# Altium PCB PCB 1.0.PcbDoc
Units mm, origin at the board's own origin, x right, y up, seen from the top; angles counter-clockwise.
Board outline 80.52 x 140.08 mm, 2 copper layers (Top Layer, Bottom Layer); 41 components, 49 nets, 205 pads, 6 vias.
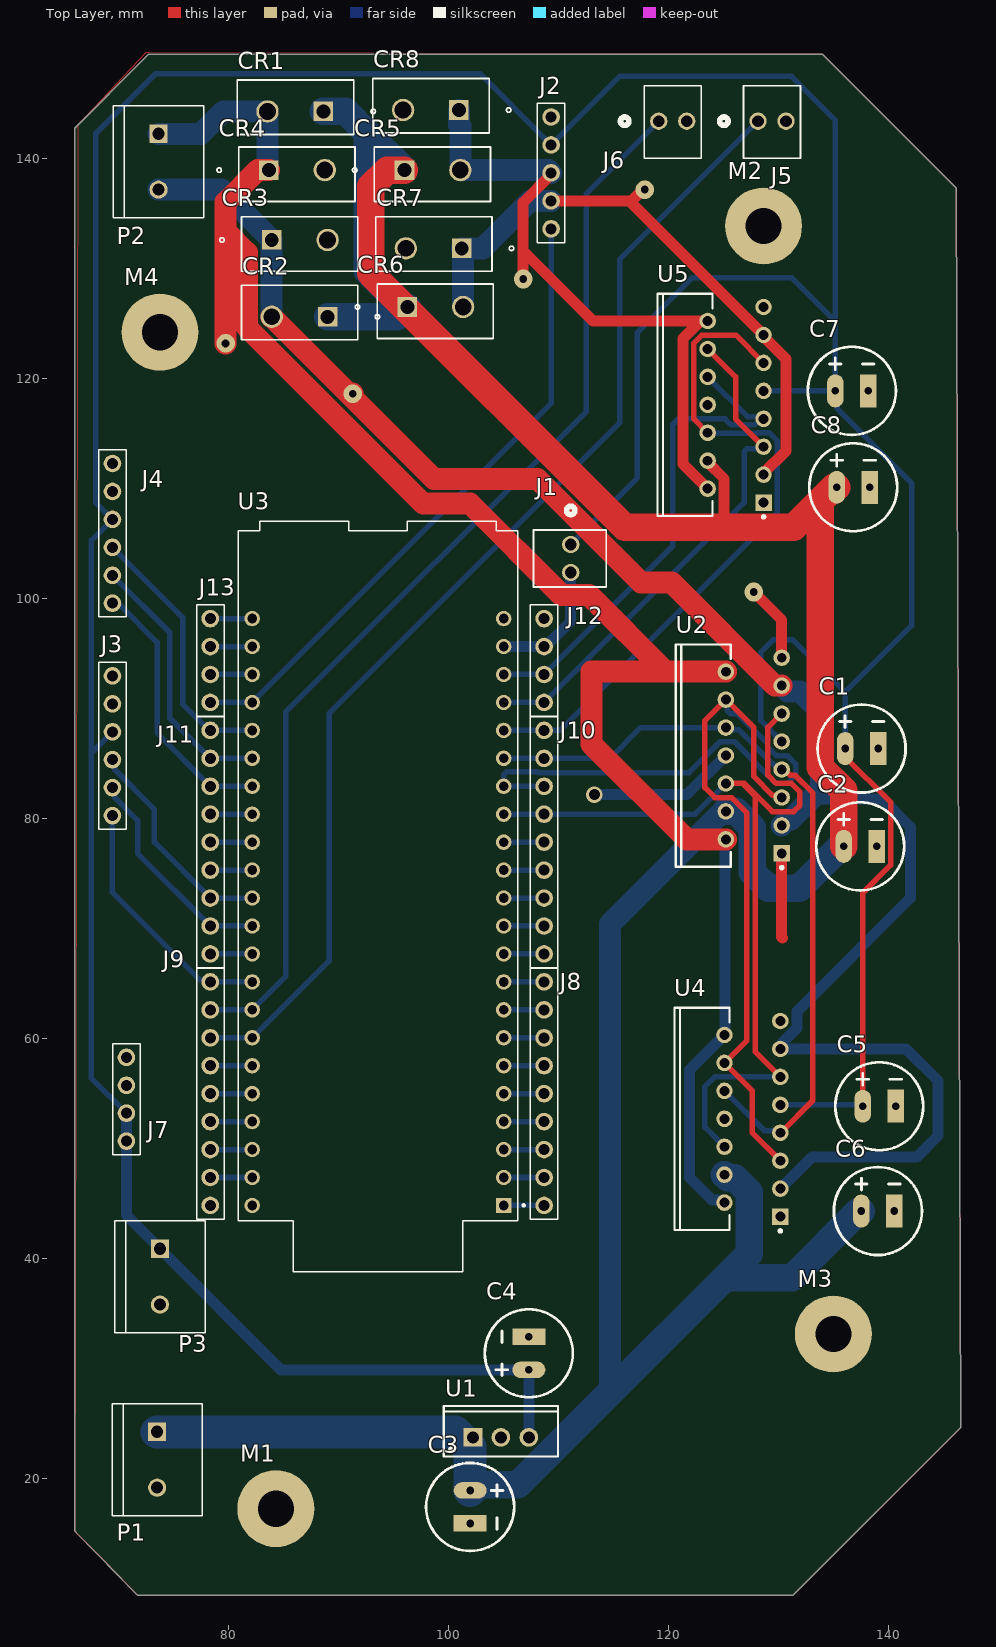
[diagram p0: Top Layer view]
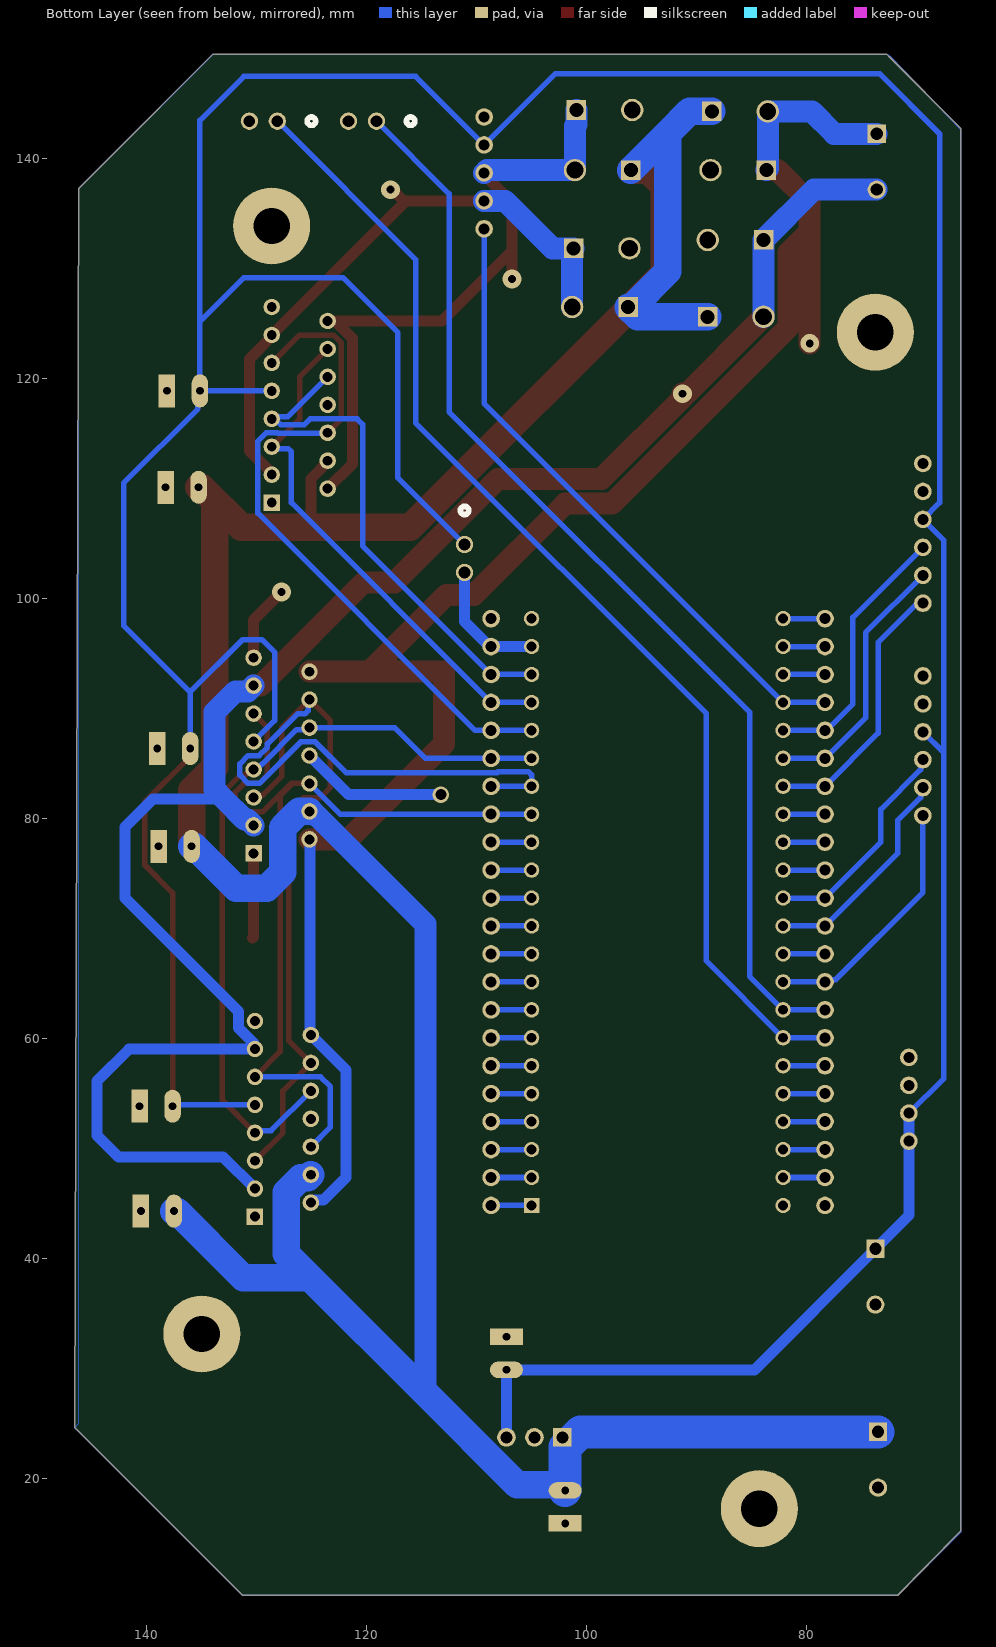
[diagram p1: Bottom Layer view, seen from below]

## Layer stack, top to bottom
Top Solder: solder mask 0.0102, Solder Resist, Dk 3.5
Top Layer: signal copper 0.0356
Dielectric 1: dielectric 0.32, FR-4, Dk 4.8
Bottom Layer: signal copper 0.0356
Bottom Solder: solder mask 0.0102, Solder Resist, Dk 3.5

## Board outline
66.167,15.113 71.755,9.398 131.318,9.398 146.558,24.638 146.558,25.019 146.177,137.287 143.637,139.827 133.985,149.479 72.771,149.479 72.39,149.098 66.04,142.748 66.04,15.24

## Design rules (kind name [scope] priority, off if disabled: settings)
Clearance [All] p1: gap=0.254 ignorepadtopadclearanceinfootprint=FALSE
PolygonConnect [All] p1: connectstyle=Relief reliefconductorwidth=0.254 reliefentries=4 polygonreliefangle="90 Angle" airgapwidth=0.254
RoutingVias [All] p1: holewidth=0.711 width=1.7 viastyle="Through Hole" minholewidth=0.711 minwidth=1.7 maxholewidth=1.5 maxwidth=3
SolderMaskExpansion [All] p1: expansion=0.102 istentingtop=FALSE
SupplyNets "Schematic Supply Nets_3" [InNet('GND')] p1: voltage=0.000
SupplyNets "Schematic Supply Nets_2" [InNet('+5')] p2: voltage=0.000
SupplyNets "Schematic Supply Nets_1" [InNet('Vin')] p3: voltage=0.000
SupplyNets "Schematic Supply Nets" [InNet('+12')] p4: voltage=0.000
Width [All] p1: maxlimit=5 minlimit=0.5 preferedwidth=0.5 minimp=50.000000 maximp=50.000000 favimp=50.000000
30 further rules are at their usual default settings.

## Components (designator, comment, footprint, x,y, rotation, side; value= is the part's Value field where it differs from the comment)
C1 "Cap" "Cap Lyt Ø8" 136.065,86.36 r0 top value=100nF
C2 "Cap" "Cap Lyt Ø8" 135.938,77.47 r0 top value=100nF
C3 "Cap" "Cap Lyt Ø8" 101.981,18.923 r270 top value=0.33uF
C4 "Cap" "Cap Lyt Ø8" 107.315,29.893 r90 top value=0.1uF
C5 "Cap" "Cap Lyt Ø8" 137.668,53.848 r0 top value=100nF
C6 "Cap" "Cap Lyt Ø8" 137.541,44.323 r0 top value=100nF
C7 "Cap" "Cap Lyt Ø8" 135.176,118.872 r0 top value=100nF
C8 "Cap" "Cap Lyt Ø8" 135.303,110.109 r0 top value=100nF
CR1 "BYV29-400" SOD59_WEN 88.646,144.272 r180 top
CR2 "BYV29-400" SOD59_WEN 89.027,125.603 r180 top
CR3 "BYV29-400" SOD59_WEN 83.947,132.588 r0 top
CR4 "BYV29-400" SOD59_WEN 83.693,138.938 r0 top
CR5 "BYV29-400" SOD59_WEN 96.012,138.938 r0 top
CR6 "BYV29-400" SOD59_WEN 96.266,126.492 r0 top
CR7 "BYV29-400" SOD59_WEN 101.219,131.826 r180 top
CR8 "BYV29-400" SOD59_WEN 100.965,144.399 r180 top
J1 "22232021" CONN_A-6373-02A_MOL 111.125,104.902 r270 top
J2 "Header 1x5" "Header 1x5" 109.347,133.604 r90 top
J3 "Header 1x6" "Header 1x6" 69.469,92.964 r270 top
J4 "Header 1x6" "Header 1x6" 69.469,112.268 r270 top
J5 "22232021" CONN_A-6373-02A_MOL 128.143,143.383 r0 top
J6 "22232021" CONN_A-6373-02A_MOL 119.126,143.383 r0 top
J7 "Header 1x4" "Header 1x4" 70.739,58.293 r270 top
J8 "Header 1x9" "Header 1x9" 108.712,44.831 r90 top
J9 "Header 1x9" "Header 1x9" 78.359,65.151 r270 top
J10 "Header 1x9" "Header 1x9" 108.712,67.691 r90 top
J11 "Header 1x9" "Header 1x9" 78.359,88.011 r270 top
J12 "Header 1x4" "Header 1x4" 108.712,90.551 r90 top
J13 "Header 1x4" "Header 1x4" 78.359,98.171 r270 top
M1 "Screw Hole" "M3 Hole" 84.328,17.272 r0 top
M2 "Screw Hole" "M3 Hole" 128.651,133.858 r0 top
M3 "Screw Hole" "M3 Hole" 135.001,33.147 r0 top
M4 "Screw Hole" "M3 Hole" 73.787,124.206 r0 top
P1 "282837-2" TE_282837-2 73.533,21.717 r270 top
P2 "282837-2" TE_282837-2 73.66,139.7 r270 top
P3 "282837-2" TE_282837-2 73.787,38.354 r270 top
U1 "L7805CV" TO220 104.775,23.749 r0 top
U2 "L298N" STM-FM-15 127.762,85.725 r180 top
U3 "ESP32-S3-DEVKITM-1-N8" MODULE_ESP32-S3-DEVKITM-1-N8 93.599,74.801 r180 top
U4 "L298N" STM-FM-15 127.635,52.705 r180 top
U5 "L298N" STM-FM-15 126.111,117.602 r180 top

## Footprints (in the part's own frame and the unit in brackets; to place one, negate y for a bottom-side part, rotate by r counter-clockwise, add the part's x,y. Pads: shape width x height; smd on the part's side, far side on the other; paste and mask are expansions set on the pad)
"Cap Lyt Ø8" [mm] "Capacitor"
  oval 1.5x3 hole 0.7: 1(0,0)
  rect 1.5x3 hole 0.7: 2(3,0)
  silkscreen extent -2.5,-4 5.5,4
CONN_A-6373-02A_MOL [mil]
  round 62 hole 42: 1(0,0) 2(100,0)
  silkscreen extent -137,-133 152,127
"Header 1x4" [mm]
  round 1.6 hole 1: 1(0,0) 2(2.54,0) 3(5.08,0) 4(7.62,0)
  silkscreen extent -1.25,-1.25 8.87,1.25, body extent -1.27,-1.27 8.89,1.27, height 8.89
"Header 1x5" [mm]
  round 1.6 hole 1: 1(0,0) 2(2.54,0) 3(5.08,0) 4(7.62,0) 5(10.16,0)
  silkscreen extent -1.25,-1.25 11.41,1.25, body extent -1.27,-1.27 11.43,1.27, height 8.89
"Header 1x6" [mm]
  round 1.6 hole 1: 1(0,0) 2(2.54,0) 3(5.08,0) 4(7.62,0) 5(10.16,0) 6(12.7,0)
  silkscreen extent -1.25,-1.25 13.95,1.25, body extent -1.26,-1.27 13.98,1.27, height 8.89
"Header 1x9" [mm]
  round 1.6 hole 1: 1(0,0) 2(2.54,0) 3(5.08,0) 4(7.62,0) 5(10.16,0) 6(12.7,0) 7(15.24,0) 8(17.78,0) 9(20.32,0)
  silkscreen extent -1.25,-1.25 21.57,1.25, body extent -1.27,-1.27 21.59,1.27, height 8.89
"M3 Hole" [mm]
  round 7 hole 3.3 mask+0: 1(0,0)
MODULE_ESP32-S3-DEVKITM-1-N8 [mil]
  rect 55x55 / inner round 55 / far side rect 55x55 hole 35: J1_1(-450,1179.92)
  round 55 hole 35: J1_2(-450,1079.92) J1_3(-450,979.92) J1_4(-450,879.92) J1_5(-450,779.92) J1_6(-450,679.92) J1_7(-450,579.92) J1_8(-450,479.92) J1_9(-450,379.92) J1_10(-450,279.92) J1_11(-450,179.92) J1_12(-450,79.92) J1_13(-450,-20.08) J1_14(-450,-120.08) J1_15(-450,-220.08) J1_16(-450,-320.08) J1_17(-450,-420.08) J1_18(-450,-520.08) J1_19(-450,-620.08) J1_20(-450,-720.08) J1_21(-450,-820.08) J1_22(-450,-920.08) J3_1(450,1179.92) J3_2(450,1079.92) J3_3(450,979.92) J3_4(450,879.92) J3_5(450,779.92) J3_6(450,679.92) J3_7(450,579.92) J3_8(450,479.92) J3_9(450,379.92) J3_10(450,279.92) J3_11(450,179.92) J3_12(450,79.92) J3_13(450,-20.08) J3_14(450,-120.08) J3_15(450,-220.08) J3_16(450,-320.08) J3_17(450,-420.08) J3_18(450,-520.08) J3_19(450,-620.08) J3_20(450,-720.08) J3_21(450,-820.08) J3_22(450,-920.08)
  silkscreen extent -526,-1269 500,1417
SOD59_WEN [mil]
  rect 70x70 / inner round 60 / far side rect 70x70 hole 50 paste-99999 mask+0: 1(0,0)
  round 80 / inner round 60 / far side round 80 hole 60 paste-99999 mask+0: 2(200,0)
  silkscreen extent -186,-113 308,83
STM-FM-15 [mm] "FM, 15-Leads, Body 20.2x5mm, Pitch 1.27mm"
  rect 1.5x1.5 hole 0.9: 1(-2.54,8.89)
  round 1.5 hole 0.9: 2(2.54,7.62) 3(-2.54,6.35) 4(2.54,5.08) 5(-2.54,3.81) 6(2.54,2.54) 7(-2.54,1.27) 8(2.54,0) 9(-2.54,-1.27) 10(2.54,-2.54) 11(-2.54,-3.81) 12(2.54,-5.08) 13(-2.54,-6.35) 14(2.54,-7.62) 15(-2.54,-8.89)
  silkscreen extent -2.67,-10.1 7.09,10.31, body extent -2.8,-10.1 7.09,10.1, height 21
TE_282837-2 [mm]
  rect 1.65x1.65 / inner round 1.65 / far side rect 1.65x1.65 hole 1.1: 1(-2.54,0)
  round 1.65 hole 1.1: 2(2.54,0)
  silkscreen extent -5.08,-4.1 5.08,4.1, body extent -5.68,-4.1 5.08,4.1, height 10
TO220 [mm] "TO, Thru-Hole, Vertical, Heatsink Mounted; 3 In-Line Leads; Pitch 2.54 mm"
  rect 1.7x1.7 hole 1.1: 1(-2.54,0)
  round 1.7 hole 1.1: 2(0,0) 3(2.54,0)
  silkscreen extent -5.2,-1.75 5.2,2.85, body extent -5.25,-1.8 5.25,2.9, height 19.7

## Part data
C1 C2 C3 C4 C5 C6 C7 C8: library part "Capacitor electrolytic"
CR1 CR2 CR3 CR4 CR5 CR6 CR7 CR8: library part BYV29-500, "No Description Available", Manufacturer_Name="WeEN Semiconductors", Copyright="Copyright (C) 2025 Ultra Librarian. All rights reserved.", Manufacturer_Part_Number=BYV29-500
J1 J5 J6: library part CMP-005-000000-1, "Connector Header Through Hole 2 position 0.100 (2.54mm)", Package=None, Check_prices=https://www.snapeda.com/parts/22232021/Molex/view-part/?ref=eda, Component Type=Standard, Design Item ID=22232021, MF=Molex, MP=22232021, Pin Count=2, SnapEDA_Link=https://www.snapeda.com/parts/22232021/Molex/view-part/?ref=snap, Source=22232021.SchLib
P1 P2 P3: library part CMP-007-000000-1, "Ð Ð°Ð·ÑŠÐµÐ¼Ð½Ñ‹Ðµ ÐºÐ»ÐµÐ¼Ð¼Ð½Ñ‹Ðµ ÐºÐ¾Ð»Ð¾Ð´ÐºÐ¸ Ð Ð¾Ð·ÐµÑ‚ÐºÐ° 2 Ð¿Ð¾Ð»Ð¾Ð¶ÐµÐ½Ð¸Ñ 5,08 Ð¼Ð¼ ÐŸÑ€Ð¸Ð¿Ð¾Ð¹ Ð¿Ñ€ÑÐ¼Ð¾Ð¹ Ñ‡ÐµÑ€ÐµÐ· Ð¾Ñ‚Ð²ÐµÑ€ÑÑ‚Ð¸Ðµ 13,5 Ð / ÐºÐ¾Ð½Ñ‚Ð°ÐºÑ‚", Package=None, Availability="In Stock", Check_prices=https://www.snapeda.com/parts/282837-2/TE+Connectivity+AMP+Connectors/view-part/?ref=eda, Component Type=Standard, Design Item ID=282837-2, MF="TE Connectivity", MP=282837-2, Pin Count=2, Price=None, Purchase-URL=https://pricing.snapeda.com/search/part/282837-2/?ref=eda, SnapEDA_Link=https://www.snapeda.com/parts/282837-2/TE+Connectivity+AMP+Connectors/view-part/?ref=snap, Source=282837-2.SchLib
U1: library part CMP-0244-00483-1, "Positive Voltage Regulator, 5V, 3-Pin TO-220", ComponentLink1Description="Manufacturer URL", ComponentLink1URL=http://www.st.com, ComponentLink2Description=Datasheet, ComponentLink2URL=http://www.st.com/internet/com/TECHNICAL_RESOURCES/TECHNICAL_LITERATURE/DATASHEET/CD00000444.pdf, ComponentLink3Description="Package Specification", ComponentLink3URL=http://www.st.com/internet/com/TECHNICAL_RESOURCES/TECHNICAL_LITERATURE/PACKAGE_INFORMATION/CD00004649.pdf, DatasheetVersion=16/11/2011, PackageDescription="TO, Thru-Hole, Vertical, Heatsink Mounted; 3 In-Line Leads; Pitch 2.54 mm", PackageReference=TO220, PackageVersion=ver3.0
U2 U4 U5: library part CMP-2000-06526-1, "Dual Full-Bridge Driver, 4.8 to 46 V, -40 to 150 degC, 15-Pin FM (MW 15L), RoHS, Tube", Driver Case Style=Multiwatt, Manufacturer=STMicroelectronics, Operating Temperature Max=130°C, Operating Temperature Min=-25°C, Output Current=2A, Output Voltage=46V, Package Description="15-Pin Flange Mount, Body 5 x 19.6 mm, Pitch 1.27 mm", Package Reference=FM-15, PartNumber=L298, Supply Voltage Max=7V, Supply Voltage Min=4.5V, Automotive Qualification Standard=-, Datasheet URL=https://datasheet.ciiva.com/15109/getdatasheetpartid-50682-15109332.pdf, Datasheet Version=01/2000, Manufacturer URL=http://www.st.com/, Motor Type=FullBridge, Mounting Technology=ThroughHole, MSL=-, No. of Outputs=4Outputs, No. of Pins=15Pins, Packaging=Each, Product Range=-, SVHC=NoSVHC(17-Dec-2015)
U3: library part CMP-003-000000-1, Package=None, Availability=Unavailable, Component Type=Standard, Design Item ID=ESP32-S3-DEVKITM-1-N8, MF="{'manufacturer': u'Espressif Systems'}", MP=ESP32-S3-DEVKITM-1-N8, Pin Count=44, Price=None, Source=ESP32-S3-DEVKITM-1-N8.SchLib

## Via types
v1: diameter 1.7, hole 0.711, Top Layer to Bottom Layer, 5 vias
v2: diameter 1.5, hole 1, Top Layer to Bottom Layer, 1 vias

## Nets (pads, with @x,y where several pads share a name; then routed paths per layer and width w, separated by ;. In a path a pad name is that pad's centre, name@x,y a point inside that pad or via, vN(x,y) a via of type N, cw(c..) or ccw(c..) an arc to the next point about the centre after c; other vN are vias at no path point)
+5: C1.1 C4.1 C5.1 C7.1 J1.1 J2.4 J3.3 J4.3 J7.3 J7.4 P3.1 U1.3 U2.9 U4.9 U5.9 | length 403
  Top Layer w0.5: C1.1 136.065,85.61 140.192,81.483 140.192,75.761 137.668,73.237 C5.1
  Bottom Layer w0.5: J3.3 67.564,85.979 ; J7.3 67.564,56.388 67.564,85.979 ; J1.1 117.191,110.968 117.191,124.176 122.174,129.159 131.191,129.159 135.176,125.174 ; U5.9 C7.1 ; U4.9 137.541,53.975 C5.1 ; U2.9 128.397,88.9 128.397,95.123 129.54,96.266 131.286,96.266 136.065,91.487 ; C1.1 136.065,91.487 ; 67.564,85.979 67.564,105.283 J4.3 67.945,108.712 67.945,142.24 73.406,147.701 102.87,147.701 J2.4 115.57,147.447 131.191,147.447 135.176,143.462 135.176,125.174 ; C7.1 135.367,118.681 135.367,117.236 142.113,110.49 142.113,97.535 136.065,91.487 ; C7.1 135.176,125.174
  Bottom Layer w1: J7.3 J7.4 70.739,43.942 P3.1 84.788,29.893 C4.1 U1.3
+12: C2.1 C3.1 C6.1 C8.1 CR1.1 CR2.1 CR5.1 CR6.1 P1.1 U1.1 U2.4 U4.4 U5.4 | length 305.2
  Top Layer w1: U5.4 123.571,112.387 125.075,110.883 125.075,106.504 125.661,105.918
  Top Layer w2.5: CR5.1 94.428,138.938 92.964,137.474 92.964,129.54 116.046,106.458 125.661,106.458 131.402,106.458 135.053,110.109 C8.1 ; 133.811,108.867 133.811,84.676 135.938,82.549 C2.1
  Bottom Layer w2: 114.695,27.799 114.695,70.412 124.642,80.359 124.936,80.359 U2.4
  Bottom Layer w2.5: CR1.1 90.678,144.272 92.647,142.303 ; CR2.1 95.377,125.603 CR6.1 95.885,126.492 92.647,129.731 92.647,142.303 ; CR5.1 92.647,142.303 ; C3.1 101.981,19.173 102.231,19.423 106.318,19.423 114.695,27.799 125.172,38.277 ; U4.4 125.381,47.339 126.029,47.339 127.349,46.019 127.349,40.454 125.172,38.277 ; U2.4 126.171,80.645 127.635,79.181 127.635,75.124 129.099,73.66 131.878,73.66 135.688,77.47 C2.1 ; C6.1 137.291,44.323 131.245,38.277 125.172,38.277
  Bottom Layer w3: P1.1 100.584,24.257 101.981,22.86 C3.1
GND: C1.2 C2.2 C3.2 C4.2 C5.2 C6.2 C7.2 C8.2 CR3.2 CR4.2 CR7.2 CR8.2 J2.5 J3.1 J3.2 J4.1 J4.2 J5.2 J6.2 J7.1 J7.2 J9.9 J12.4 P1.2 P3.2 U1.2 U2.1 U2.8 U2.15 U3.J1_22 U3.J3_1 U4.1 U4.8 U4.15 U5.1 U5.8 U5.15 | length 28.2
  Top Layer w1: v1(127.762,100.584) 130.302,98.044 U2.15 ; U2.1 130.302,69.235 130.386,69.152
  Bottom Layer w1: v2(113.284,82.169) 121.666,82.169 U2.8
NetCR1_2: CR1.2 CR4.1 P2.1 U2.2 U2.14 U4.2 U4.14 | length 165.5
  Top Layer w2: v1(79.756,123.19) 79.756,133.35 ; CR4.1 82.677,138.938 79.756,136.017 79.756,133.35 ; U2.2 121.666,78.105 112.995,86.776 112.995,93.345 119.761,93.345 ; U2.14 119.761,93.345 ; 79.756,133.35 81.677,131.429 81.677,124.663 97.723,108.617 101.983,108.617 110.279,100.321 112.785,100.321 119.761,93.345
  Bottom Layer w1: U4.2 124.96,45.085 124.71,45.335 123.956,45.335 121.92,47.371 121.92,57.15 U4.14 125.158,60.389 125.158,78.041 U2.2
  Bottom Layer w2: P2.1 77.525,142.24 79.551,144.266 83.56,144.266 CR1.2 83.566,139.065 CR4.1
NetCR2_2: CR2.2 CR3.1 P2.2 U2.3 U2.13 U4.3 U4.13 | length 170.7
  Top Layer w2: CR2.2 90.938,118.612 v1(91.307,118.612) ; v1@91.123,118.427 98.679,110.871 108.092,110.871 117.49,101.473 120.282,101.473 129.68,92.075 U2.13
  Bottom Layer w1: U4.3 133.063,49.243 142.588,49.243 144.526,51.181 144.526,56.134 141.605,59.055 U4.13 130.271,59.151 130.271,59.564 131.679,60.972 131.679,62.464 141.986,72.771 141.986,79.248 139.446,81.788 133.009,81.788 ; U2.3 130.398,79.471 131.287,79.471 132.461,80.645
  Bottom Layer w2: P2.2 79.375,137.16 CR3.1 CR2.2 ; U2.3 130.838,79.911 131.132,79.911 133.009,81.788 133.858,82.637 133.858,89.662 131.953,91.567 130.81,91.567 U2.13
NetCR5_2: CR5.2 CR8.1 J2.3 U5.2 U5.14 | length 60.7
  Top Layer w1: v1(106.807,129.032) 106.807,131.572 ; J2.3 109.347,138.539 106.807,135.999 106.807,131.572 ; 122.822,125.126 121.313,123.617 121.313,112.24 U5.2 ; U5.14 113.157,125.222 106.807,131.572
  Bottom Layer w2: CR8.1 100.965,143.074 101.086,142.953 101.086,138.944 CR5.2 109.093,138.938 J2.3
NetCR6_2: CR6.2 CR7.1 J2.2 U5.3 U5.13 | length 56.4
  Top Layer w1: J2.2 115.951,136.144 ; v1(117.856,137.16) 117.667,137.16 116.651,136.144 115.951,136.144 ; U5.3 128.651,111.387 130.683,113.419 130.683,121.785 128.651,123.817 U5.13 116.459,136.144 115.951,136.144
  Bottom Layer w2: CR6.2 101.346,131.699 CR7.1 103.124,131.826 107.442,136.144 J2.2
NetJ2_1: J2.1 J13.4 U3.J3_19 | length 58.1
  Bottom Layer w0.5: J13.4 U3.J3_19 109.347,117.729 J2.1
NetJ3_4: J3.4 J11.7 U3.J3_12 | length 20.1
  Bottom Layer w0.5: J3.4 69.679,85.134 69.679,84.438 73.279,80.838 73.279,77.851 J11.7 U3.J3_12
NetJ3_5: J3.5 J11.8 U3.J3_11 | length 20.1
  Bottom Layer w0.5: J3.5 69.679,82.594 69.679,81.898 71.755,79.822 71.755,76.835 J11.8 U3.J3_11
NetJ3_6: J3.6 J9.1 U3.J3_9 | length 23.1
  Bottom Layer w0.5: J3.6 69.469,73.279 77.387,65.361 78.149,65.361 J9.1 U3.J3_9
NetJ4_4: J4.4 J11.1 U3.J3_18 | length 24.2
  Bottom Layer w0.5: J4.4 75.838,98.279 75.838,90.405 78.232,88.011 U3.J3_18
NetJ4_5: J4.5 J11.2 U3.J3_17 | length 24.1
  Bottom Layer w0.5: J4.5 74.676,96.901 74.676,89.154 J11.2 U3.J3_17
NetJ4_6: J4.6 J11.3 U3.J3_16 | length 24.4
  Bottom Layer w0.5: J4.6 69.679,99.358 70.187,99.358 73.533,96.012 73.533,87.757 J11.3 U3.J3_16
NetJ5_1: J5.1 J9.3 U3.J3_7 | length 106.2
  Bottom Layer w0.5: J9.3 U3.J3_7 89.154,67.056 89.154,89.535 115.57,115.951 115.57,130.81 J5.1
NetJ6_1: J6.1 J9.2 U3.J3_8 | length 99.9
  Bottom Layer w0.5: J9.2 U3.J3_8 85.217,65.659 85.217,89.662 112.522,116.967 112.522,136.779 J6.1
NetJ8_1: J8.1 U3.J1_1 | length 3.7
  Bottom Layer w0.5: U3.J1_1 J8.1
NetJ8_2: J8.2 U3.J1_2 | length 3.7
  Bottom Layer w0.5: U3.J1_2 J8.2
NetJ8_3: J8.3 U3.J1_3 | length 3.7
  Bottom Layer w0.5: U3.J1_3 J8.3
NetJ8_4: J8.4 U3.J1_4 | length 3.7
  Bottom Layer w0.5: U3.J1_4 J8.4
NetJ8_5: J8.5 U3.J1_5 | length 3.7
  Bottom Layer w0.5: U3.J1_5 J8.5
NetJ8_6: J8.6 U3.J1_6 | length 3.7
  Bottom Layer w0.5: U3.J1_6 J8.6
NetJ8_7: J8.7 U3.J1_7 | length 3.7
  Bottom Layer w0.5: U3.J1_7 J8.7
NetJ8_8: J8.8 U3.J1_8 | length 3.7
  Bottom Layer w0.5: U3.J1_8 J8.8
NetJ8_9: J8.9 U3.J1_9 | length 3.7
  Bottom Layer w0.5: U3.J1_9 J8.9
NetJ9_4: J9.4 U3.J3_6 | length 3.8
  Bottom Layer w0.5: J9.4 U3.J3_6
NetJ9_5: J9.5 U3.J3_5 | length 3.8
  Bottom Layer w0.5: J9.5 U3.J3_5
NetJ9_6: J9.6 U3.J3_4 | length 3.8
  Bottom Layer w0.5: J9.6 U3.J3_4
NetJ9_7: J9.7 U3.J3_3 | length 3.8
  Bottom Layer w0.5: J9.7 U3.J3_3
NetJ9_8: J9.8 U3.J3_2 | length 3.8
  Bottom Layer w0.5: J9.8 U3.J3_2
NetJ10_1: J10.1 U3.J1_10 | length 3.7
  Bottom Layer w0.5: U3.J1_10 J10.1
NetJ10_2: J10.2 U3.J1_11 | length 3.7
  Bottom Layer w0.5: U3.J1_11 J10.2
NetJ10_3: J10.3 U3.J1_12 | length 3.7
  Bottom Layer w0.5: U3.J1_12 J10.3
NetJ10_4: J10.4 U3.J1_13 | length 3.7
  Bottom Layer w0.5: U3.J1_13 J10.4
NetJ10_5: J10.5 U3.J1_14 | length 3.7
  Bottom Layer w0.5: U3.J1_14 J10.5
NetJ10_6: J10.6 U2.6 U2.11 U3.J1_15 U4.6 U4.11 | length 83
  Top Layer w0.5: U2.6 U2.6@125.493,83.185 ; U4.11 127.881,58.809 127.881,82.05 126.746,83.185 U2.6@125.493,83.185 ; U2.11 129.048,88.281 129.048,83.936 129.783,83.201 131.175,83.201 131.953,82.423 131.953,81.192 131.39,80.629 129.451,80.629 127.956,82.125 126.895,83.185 U2.6@125.493,83.185
  Bottom Layer w0.5: U3.J1_15 122.428,80.391 U2.6 ; U4.6 123.317,51.943 123.317,55.626 124.206,56.515 U4.11
NetJ10_7: J10.7 U2.5 U2.12 U3.J1_16 U4.5 U4.12 | length 104.4
  Top Layer w0.5: U4.5 127.635,51.435 127.635,55.245 U4.12 127.127,59.817 127.127,80.513 125.741,81.899 124.222,81.899 123.317,82.804 123.317,88.9 U2.12 127.762,88.265 127.762,83.82 129.476,82.106 130.111,82.106 U2.5
  Bottom Layer w0.5: J10.7 U3.J1_16 105.033,82.935 105.033,83.976 105.326,84.269 108.07,84.269 108.172,84.167 121.891,84.167 124.703,86.979 126.005,86.979 129.783,83.201 130.821,83.201 131.556,83.936 131.556,84.974 130.805,85.725 129.799,85.725 129.048,86.476 129.048,86.775 126.304,89.519 125.643,89.519 125.35,89.812 125.35,90.677 U2.12
NetJ10_8: J10.8 U2.7 U2.10 U3.J1_17 U4.7 U4.10 | length 70.5
  Top Layer w0.5: U4.7 133.133,54.393 133.133,82.31 131.487,83.955 131.073,83.955 130.573,84.455 U2.7
  Bottom Layer w0.5: U3.J1_17 J10.8 114.681,85.471 117.475,88.265 U2.10 125.413,88.074 126.384,88.074 129.486,84.971 129.515,84.971 130.031,84.455 U2.7 ; U4.10 128.714,51.626 129.984,51.626 U4.7
NetJ10_9: J10.9 U3.J1_18 U5.6 U5.11 | length 62.6
  Top Layer w0.5: U5.6 122.317,116.316 122.317,123.201 123.052,123.936 126.127,123.936 U5.11
  Bottom Layer w0.5: U3.J1_18 110.163,88.011 129.905,107.753 129.905,114.311 129.17,115.046 128.132,115.046 128.101,115.015 123.618,115.015 U5.6
NetJ11_4: J11.4 U3.J3_15 | length 3.8
  Bottom Layer w0.5: J11.4 U3.J3_15
NetJ11_5: J11.5 U3.J3_14 | length 3.8
  Bottom Layer w0.5: J11.5 U3.J3_14
NetJ11_6: J11.6 U3.J3_13 | length 3.8
  Bottom Layer w0.5: J11.6 U3.J3_13
NetJ11_9: J11.9 U3.J3_10 | length 3.8
  Bottom Layer w0.5: J11.9 U3.J3_10
NetJ12_1: J12.1 U3.J1_19 U5.5 U5.12 | length 47
  Top Layer w0.5: U5.12 126.111,120.142 126.111,116.332 U5.5
  Bottom Layer w0.5: U3.J1_19 J12.1 126.873,108.712 126.873,113.339 127.166,113.632 128.491,113.632 U5.5
NetJ12_2: J12.2 U3.J1_20 U5.7 U5.10 | length 46.4
  Bottom Layer w0.5: U3.J1_20 J12.2 120.396,104.775 120.396,115.824 120.888,116.316 125.161,116.316 125.708,115.769 127.818,115.769 U5.7@128.38,116.332 ; U5.10 127.19,116.523 128.46,116.523 U5.7@128.516,116.467
NetJ13_1: J13.1 U3.J3_22 | length 3.8
  Bottom Layer w0.5: J13.1 U3.J3_22
NetJ13_2: J13.2 U3.J3_21 | length 3.8
  Bottom Layer w0.5: J13.2 U3.J3_21
NetJ13_3: J13.3 U3.J3_20 | length 3.8
  Bottom Layer w0.5: J13.3 U3.J3_20
Vin: J1.2 J12.3 U3.J1_21 | length 11.5
  Bottom Layer w1: U3.J1_21 108.839,95.631 111.125,97.917 J1.2
pads on no net: M1.1 M2.1 M3.1 M4.1

## Polygon pours and split planes (outlines as drawn)
GND on Bottom Layer "NONET_L02_P001" (solid, shelved, pour order 1): 72.644,149.479 72.39,149.225 66.04,142.621 66.04,15.113 71.755,9.398 131.318,9.398 146.558,24.638 146.177,25.019 146.177,137.287 133.985,149.479
GND on Top Layer "NONET_L01_P000" (solid, shelved, pour order 0): 72.771,149.606 72.517,149.606 66.294,143.002 66.294,142.621 66.04,15.24 66.802,14.478 71.755,9.398 131.318,9.398 146.558,24.638 146.558,25.4 146.177,137.287 133.985,149.479

## Silkscreen, mask and mechanical layers (free items; w line width, h text height)
Top Paste:
  text "Buttons" at 116.205,147.066 h1.52
  text "Tilt" at 105.918,145.542 h1.52
  text "Azimut" at 70.866,145.161 h1.52
  text "Tilt Out" at 108.966,130.048 h1.52
  text "Azimut out" at 69.088,117.856 h1.52
  text "Encoders" at 68.199,113.919 h1.52
  text "USB port here" at 82.804,102.87 h1.52
  text "Lil Koch" at 67.183,59.563 h1.52
  text "SDR" at 69.469,43.561 h1.52
  text "12V Vin" at 69.215,27.051 h1.52
  text "THIS SIDE TOWARDS ENEMY" at 110.871,25.146 h1.52
  text "Motor Control 1.1" at 110.998,22.479 h1.52
  text "Forspaendt & Antaendt" at 110.871,20.193 h1.52
Text:
  text "Buttons" at 117.983,147.193 h1.52
  text "Azimut" at 71.247,146.05 h1.52
  text "Tilt" at 106.68,145.923 h1.52
  text "Buttons" at 211.836,137.795 h1.52
  text "Azimut" at 165.1,136.652 h1.52
  text "Tilt" at 200.533,136.525 h1.52
  text "Tilt Out" at 109.347,130.048 h1.52
  text "Tilt Out" at 203.2,120.65 h1.52
  text "Azimut out" at 69.469,118.745 h1.52
  text "Encoders" at 67.183,114.808 h1.52
  text "Azimut out" at 163.322,109.347 h1.52
  text "Encoders" at 161.036,105.41 h1.52
  text "USB port here" at 82.042,100.838 h1.52
  text "USB port here" at 175.895,91.44 h1.52
  text "Lil Koch" at 67.564,60.452 h1.52
  text "Lil Koch" at 161.417,51.054 h1.52
  text "SDR" at 69.85,44.45 h1.52
  text "SDR" at 163.703,35.052 h1.52
  text "12V Vin" at 69.596,27.94 h1.52
  text "THIS SIDE TOWARDS ENEMY" at 111.252,26.035 h1.52
  text "Motor Control 1.1" at 111.379,23.368 h1.52
  text "Forspaendt & Antaendt" at 111.252,21.082 h1.52
  text "12V Vin" at 163.449,18.542 h1.52
  text "THIS SIDE TOWARDS ENEMY" at 205.105,16.637 h1.52
  text "Motor Control 1.1" at 205.232,13.97 h1.52
  text "Forspaendt & Antaendt" at 205.105,11.684 h1.52